# Altium PCB Beacon_Vcut.PcbDoc
Units mm, origin at the board's own origin, x right, y up, seen from the top; angles counter-clockwise.
Board outline 49.34 x 19.81 mm, 2 copper layers (Top Layer, Bottom Layer); 140 components, 0 nets, 340 pads, 85 vias.
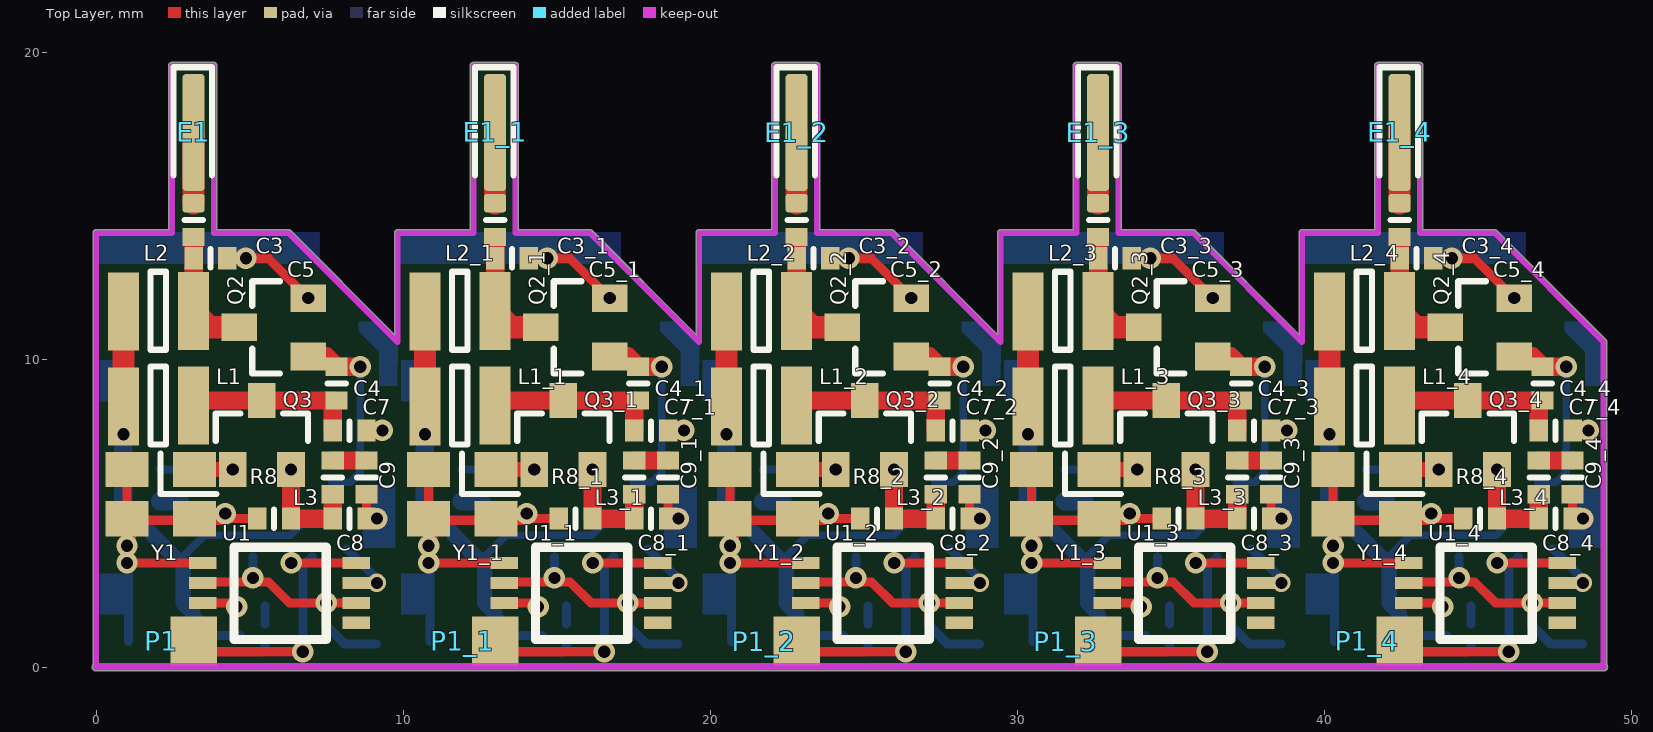
[diagram p0: Top Layer view]
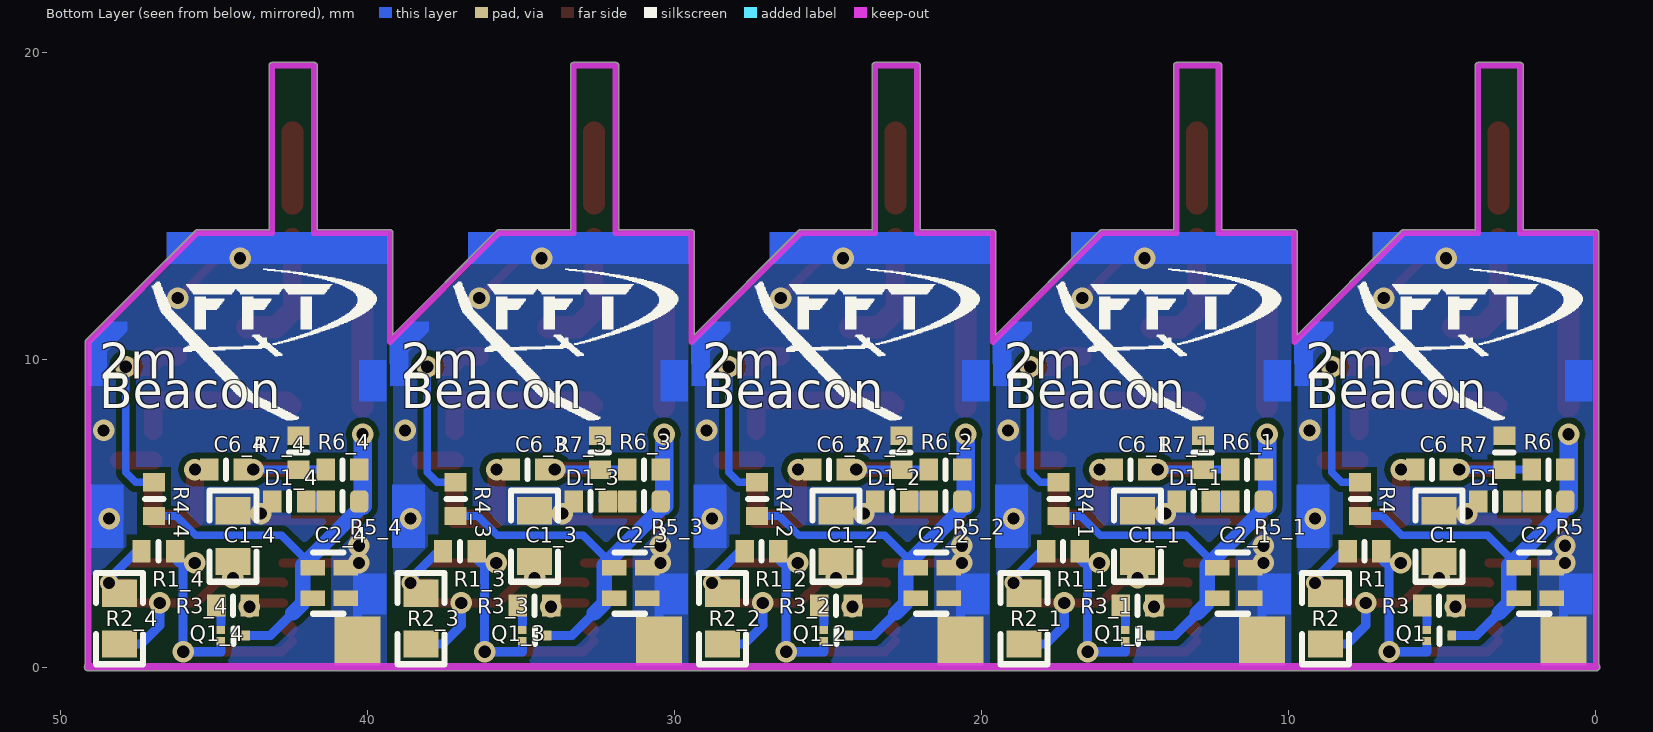
[diagram p1: Bottom Layer view, seen from below]

## Layer stack, top to bottom
Top Layer: signal copper 0.0356
Dielectric: dielectric 0.32, FR-4, Dk 4.8
Bottom Layer: signal copper 0.0356

## Board outline
0,-0.127 cw(c0,0) -0.1,0.078 -0.1,14.136 cw(c0,14.136) 0,14.237 2.364,14.237 2.364,19.586 cw(c2.464,19.586) 2.464,19.686 3.833,19.686 cw(c3.833,19.586) 3.933,19.586 3.933,14.237 6.264,14.237 cw(c6.264,14.136) 6.335,14.207 9.717,10.825 9.717,14.136 cw(c9.817,14.136) 9.817,14.237 12.181,14.237 12.181,19.586 cw(c12.282,19.586) 12.282,19.686 13.65,19.686 cw(c13.65,19.586) 13.751,19.586 13.751,14.237 16.081,14.237 cw(c16.081,14.136) 16.152,14.207 19.534,10.825 19.534,14.136 cw(c19.635,14.136) 19.635,14.237 21.998,14.237 21.998,19.586 cw(c22.099,19.586) 22.099,19.686 23.468,19.686 cw(c23.468,19.586) 23.568,19.586 23.568,14.237 25.898,14.237 cw(c25.898,14.136) 25.969,14.207 29.351,10.825 29.351,14.136 cw(c29.452,14.136) 29.452,14.237 31.816,14.237 31.816,19.586 cw(c31.916,19.586) 31.916,19.686 33.285,19.686 cw(c33.285,19.586) 33.385,19.586 33.385,14.237 35.715,14.237 cw(c35.715,14.136) 35.786,14.207 39.169,10.825 39.169,14.136 cw(c39.269,14.136) 39.269,14.237 41.633,14.237 41.633,19.586 cw(c41.733,19.586) 41.733,19.686 43.102,19.686 cw(c43.102,19.586) 43.202,19.586 43.202,14.237 45.533,14.237 cw(c45.533,14.136) 45.604,14.207 49.157,10.654 cw(c49.086,10.583) 49.187,10.583 49.187,0.078 cw(c49.086,0) 49.214,0 cw(c49.086,0) 49.086,-0.127

## Design rules (kind name [scope] priority, off if disabled: settings)
Clearance [All] p1: gap=0.254
PolygonConnect [All] p1: connectstyle=Relief reliefconductorwidth=0.254 reliefentries=4 polygonreliefangle="90 Angle" airgapwidth=0.254
RoutingVias [All] p1: holewidth=0.711 width=1.27 viastyle="Through Hole" minholewidth=0.711 minwidth=1.27 maxholewidth=0.711 maxwidth=1.27
SolderMaskExpansion [All] p1: expansion=0.102
Width [All] p1: maxlimit=0.254 minlimit=0.254 preferedwidth=0.254
28 further rules are at their usual default settings.

## Components (designator, comment, footprint, x,y, rotation, side; value= is the part's Value field where it differs from the comment)
C1 "0.1uF" 0603 5.108,4.262 r270 bottom
C1_1 "0.1uF" 0603 14.925,4.262 r270 bottom (schematic designator C1)
C1_2 "0.1uF" 0603 24.742,4.262 r270 bottom (schematic designator C1)
C1_3 "0.1uF" 0603 34.56,4.262 r270 bottom (schematic designator C1)
C1_4 "0.1uF" 0603 44.377,4.262 r270 bottom (schematic designator C1)
C2 "1000pF" CKCL22 2.507,3.235 r270 bottom
C2_1 "1000pF" CKCL22 12.324,3.235 r270 bottom (schematic designator C2)
C2_2 "1000pF" CKCL22 22.141,3.235 r270 bottom (schematic designator C2)
C2_3 "1000pF" CKCL22 31.958,3.235 r270 bottom (schematic designator C2)
C2_4 "1000pF" CKCL22 41.776,3.235 r270 bottom (schematic designator C2)
C3 "4.7pF" 0402#1 3.175,14.553 r270 top
C3_1 "4.7pF" 0402#1 12.992,14.553 r270 top (schematic designator C3)
C3_2 "4.7pF" 0402#1 22.81,14.553 r270 top (schematic designator C3)
C3_3 "4.7pF" 0402#1 32.627,14.553 r270 top (schematic designator C3)
C3_4 "4.7pF" 0402#1 42.444,14.553 r270 top (schematic designator C3)
C4 "10pF" 0402#2 7.829,9.23 r270 top
C4_1 "10pF" 0402#2 17.647,9.23 r270 top (schematic designator C4)
C4_2 "10pF" 0402#2 27.464,9.23 r270 top (schematic designator C4)
C4_3 "10pF" 0402#2 37.281,9.23 r270 top (schematic designator C4)
C4_4 "10pF" 0402#2 47.099,9.23 r270 top (schematic designator C4)
C5 "33pF" 0402#2 3.725,13.312 r180 top
C5_1 "33pF" 0402#2 13.542,13.312 r180 top (schematic designator C5)
C5_2 "33pF" 0402#2 23.36,13.312 r180 top (schematic designator C5)
C5_3 "33pF" 0402#2 33.177,13.312 r180 top (schematic designator C5)
C5_4 "33pF" 0402#2 42.994,13.312 r180 top (schematic designator C5)
C6 "22pF" 0402#2 5.334,6.43 r180 bottom
C6_1 "22pF" 0402#2 15.151,6.43 r180 bottom (schematic designator C6)
C6_2 "22pF" 0402#2 24.969,6.43 r180 bottom (schematic designator C6)
C6_3 "22pF" 0402#2 34.786,6.43 r180 bottom (schematic designator C6)
C6_4 "22pF" 0402#2 44.603,6.43 r180 bottom (schematic designator C6)
C7 "47pF" 0402#2 8.255,7.7 r180 top
C7_1 "47pF" 0402#2 18.072,7.7 r180 top (schematic designator C7)
C7_2 "47pF" 0402#2 27.89,7.7 r180 top (schematic designator C7)
C7_3 "47pF" 0402#2 37.707,7.7 r180 top (schematic designator C7)
C7_4 "47pF" 0402#2 47.524,7.7 r180 top (schematic designator C7)
C8 "100pF" 0402#2 8.255,4.834 r180 top
C8_1 "100pF" 0402#2 18.072,4.834 r180 top (schematic designator C8)
C8_2 "100pF" 0402#2 27.89,4.834 r180 top (schematic designator C8)
C8_3 "100pF" 0402#2 37.707,4.834 r180 top (schematic designator C8)
C8_4 "100pF" 0402#2 47.524,4.834 r180 top (schematic designator C8)
C9 "1000pF" 0402#2 8.805,6.175 r270 top
C9_1 "1000pF" 0402#2 18.622,6.175 r270 top (schematic designator C9)
C9_2 "1000pF" 0402#2 28.44,6.175 r270 top (schematic designator C9)
C9_3 "1000pF" 0402#2 38.257,6.175 r270 top (schematic designator C9)
C9_4 "1000pF" 0402#2 48.074,6.175 r270 top (schematic designator C9)
D1 "LED0" 0402#2 3.279,5.392 r0 bottom
D1_1 "LED0" 0402#2 13.096,5.392 r0 bottom (schematic designator D1)
D1_2 "LED0" 0402#2 22.913,5.392 r0 bottom (schematic designator D1)
D1_3 "LED0" 0402#2 32.73,5.392 r0 bottom (schematic designator D1)
D1_4 "LED0" 0402#2 42.548,5.392 r0 bottom (schematic designator D1)
E1 "Antenna" PIN1 3.175,17.406 r0 top
E1_1 "Antenna" PIN1 12.992,17.406 r0 top (schematic designator E1)
E1_2 "Antenna" PIN1 22.81,17.406 r0 top (schematic designator E1)
E1_3 "Antenna" PIN1 32.627,17.406 r0 top (schematic designator E1)
E1_4 "Antenna" PIN1 42.444,17.406 r0 top (schematic designator E1)
L1 "1uH" 1008 3.175,8.52 r180 top
L1_1 "1uH" 1008 12.992,8.52 r180 top (schematic designator L1)
L1_2 "1uH" 1008 22.81,8.52 r180 top (schematic designator L1)
L1_3 "1uH" 1008 32.627,8.52 r180 top (schematic designator L1)
L1_4 "1uH" 1008 42.444,8.52 r180 top (schematic designator L1)
L2 "1.2uH" 1008 3.175,11.6 r180 top
L2_1 "1.2uH" 1008 12.992,11.6 r180 top (schematic designator L2)
L2_2 "1.2uH" 1008 22.81,11.6 r180 top (schematic designator L2)
L2_3 "1.2uH" 1008 32.627,11.6 r180 top (schematic designator L2)
L2_4 "1.2uH" 1008 42.444,11.6 r180 top (schematic designator L2)
L3 "0.27uH" 0402#2 7.705,6.175 r90 top
L3_1 "0.27uH" 0402#2 17.522,6.175 r90 top (schematic designator L3)
L3_2 "0.27uH" 0402#2 27.34,6.175 r90 top (schematic designator L3)
L3_3 "0.27uH" 0402#2 37.157,6.175 r90 top (schematic designator L3)
L3_4 "0.27uH" 0402#2 46.974,6.175 r90 top (schematic designator L3)
P1 "Header 2" HDR1X2 1.052,0.843 r0 top
P1_1 "Header 2" HDR1X2 10.869,0.843 r0 top (schematic designator P1)
P1_2 "Header 2" HDR1X2 20.687,0.843 r0 top (schematic designator P1)
P1_3 "Header 2" HDR1X2 30.504,0.843 r0 top (schematic designator P1)
P1_4 "Header 2" HDR1X2 40.321,0.843 r0 top (schematic designator P1)
Q1 "MMBT3906" sot-923f 5.503,1.21 r270 bottom
Q1_1 "MMBT3906" sot-923f 15.32,1.21 r270 bottom (schematic designator Q1)
Q1_2 "MMBT3906" sot-923f 25.138,1.21 r270 bottom (schematic designator Q1)
Q1_3 "MMBT3906" sot-923f 34.955,1.21 r270 bottom (schematic designator Q1)
Q1_4 "MMBT3906" sot-923f 44.772,1.21 r270 bottom (schematic designator Q1)
Q2 "MMBR951L" sot-23 6.907,10.113 r90 top
Q2_1 "MMBR951L" sot-23 16.724,10.113 r90 top (schematic designator Q2)
Q2_2 "MMBR951L" sot-23 26.542,10.113 r90 top (schematic designator Q2)
Q2_3 "MMBR951L" sot-23 36.359,10.113 r90 top (schematic designator Q2)
Q2_4 "MMBR951L" sot-23 46.176,10.113 r90 top (schematic designator Q2)
Q3 "MMBR951L" sot-23 4.445,6.43 r0 top
Q3_1 "MMBR951L" sot-23 14.262,6.43 r0 top (schematic designator Q3)
Q3_2 "MMBR951L" sot-23 24.08,6.43 r0 top (schematic designator Q3)
Q3_3 "MMBR951L" sot-23 33.897,6.43 r0 top (schematic designator Q3)
Q3_4 "MMBR951L" sot-23 43.714,6.43 r0 top (schematic designator Q3)
R1 "10M" 0402#2 7.536,3.769 r180 bottom
R1_1 "10M" 0402#2 17.353,3.769 r180 bottom (schematic designator R1)
R1_2 "10M" 0402#2 27.171,3.769 r180 bottom (schematic designator R1)
R1_3 "10M" 0402#2 36.988,3.769 r180 bottom (schematic designator R1)
R1_4 "10M" 0402#2 46.805,3.769 r180 bottom (schematic designator R1)
R2 "1M" 0603 8.805,1.577 r90 bottom
R2_1 "1M" 0603 18.622,1.577 r90 bottom (schematic designator R2)
R2_2 "1M" 0603 28.44,1.577 r90 bottom (schematic designator R2)
R2_3 "1M" 0603 38.257,1.577 r90 bottom (schematic designator R2)
R2_4 "1M" 0603 48.074,1.577 r90 bottom (schematic designator R2)
R3 "5.1K" 0402#2 5.108,2 r0 bottom
R3_1 "5.1K" 0402#2 14.925,2 r0 bottom (schematic designator R3)
R3_2 "5.1K" 0402#2 24.742,2 r0 bottom (schematic designator R3)
R3_3 "5.1K" 0402#2 34.56,2 r0 bottom (schematic designator R3)
R3_4 "5.1K" 0402#2 44.377,2 r0 bottom (schematic designator R3)
R4 "39K" 0402#2 7.675,5.469 r270 bottom
R4_1 "39K" 0402#2 17.492,5.469 r270 bottom (schematic designator R4)
R4_2 "39K" 0402#2 27.309,5.469 r270 bottom (schematic designator R4)
R4_3 "39K" 0402#2 37.127,5.469 r270 bottom (schematic designator R4)
R4_4 "39K" 0402#2 46.944,5.469 r270 bottom (schematic designator R4)
R5 "3K3" 0402#3 1.544,5.392 r180 bottom
R5_1 "3K3" 0402#3 11.361,5.392 r180 bottom (schematic designator R5)
R5_2 "3K3" 0402#3 21.179,5.392 r180 bottom (schematic designator R5)
R5_3 "3K3" 0402#3 30.996,5.392 r180 bottom (schematic designator R5)
R5_4 "3K3" 0402#3 40.813,5.392 r180 bottom (schematic designator R5)
R6 "5.1K" 0402#2 1.544,6.43 r180 bottom
R6_1 "5.1K" 0402#2 11.361,6.43 r180 bottom (schematic designator R6)
R6_2 "5.1K" 0402#2 21.179,6.43 r180 bottom (schematic designator R6)
R6_3 "5.1K" 0402#2 30.996,6.43 r180 bottom (schematic designator R6)
R6_4 "5.1K" 0402#2 40.813,6.43 r180 bottom (schematic designator R6)
R7 "10K" 0402#2 2.977,6.98 r270 bottom
R7_1 "10K" 0402#2 12.794,6.98 r270 bottom (schematic designator R7)
R7_2 "10K" 0402#2 22.612,6.98 r270 bottom (schematic designator R7)
R7_3 "10K" 0402#2 32.429,6.98 r270 bottom (schematic designator R7)
R7_4 "10K" 0402#2 42.246,6.98 r270 bottom (schematic designator R7)
R8 "330" 0402#2 5.795,4.834 r0 top
R8_1 "330" 0402#2 15.612,4.834 r0 top (schematic designator R8)
R8_2 "330" 0402#2 25.43,4.834 r0 top (schematic designator R8)
R8_3 "330" 0402#2 35.247,4.834 r0 top (schematic designator R8)
R8_4 "330" 0402#2 45.064,4.834 r0 top (schematic designator R8)
U1 "LMC555CM" VSSOP8 5.969,2.413 r270 top
U1_1 "LMC555CM" VSSOP8 15.786,2.413 r270 top (schematic designator U1)
U1_2 "LMC555CM" VSSOP8 25.604,2.413 r270 top (schematic designator U1)
U1_3 "LMC555CM" VSSOP8 35.421,2.413 r270 top (schematic designator U1)
U1_4 "LMC555CM" VSSOP8 45.238,2.413 r270 top (schematic designator U1)
Y1 "48Mhz" "XTAL 3.2X2.5" 2.106,5.63 r180 top
Y1_1 "48Mhz" "XTAL 3.2X2.5" 11.923,5.63 r180 top (schematic designator Y1)
Y1_2 "48Mhz" "XTAL 3.2X2.5" 21.74,5.63 r180 top (schematic designator Y1)
Y1_3 "48Mhz" "XTAL 3.2X2.5" 31.557,5.63 r180 top (schematic designator Y1)
Y1_4 "48Mhz" "XTAL 3.2X2.5" 41.375,5.63 r180 top (schematic designator Y1)

## Footprints (in the part's own frame and the unit in brackets; to place one, negate y for a bottom-side part, rotate by r counter-clockwise, add the part's x,y. Pads: shape width x height; smd on the part's side, far side on the other; paste and mask are expansions set on the pad)
0402#1 [mm] "Chip Resistor, 2-Leads, Body 1,0x0,5mm, IPC Medium Density"
  rrect30% 0.6x0.72 smd: 1(-0.55,0)
  rect 0.6x0.72 smd: 2(0.55,0)
  Top Layer pour cut-out: -0.253,0.36 -0.253,-0.359 0.253,-0.359 0.253,0.36
  silkscreen extent 0,-0.3 0,0.3, body extent -0.55,-0.3 0.55,0.3, height 0.6
0402#2 [mm] "Chip Resistor, 2-Leads, Body 1,0x0,5mm, IPC Medium Density"
  rect 0.6x0.72 smd: 1(-0.55,0) 2(0.55,0)
  Top Layer pour cut-out: -0.253,0.36 -0.253,-0.359 0.253,-0.359 0.253,0.36
  silkscreen extent 0,-0.3 0,0.3, body extent -0.55,-0.3 0.55,0.3, height 0.6
0402#3 [mm] "Chip Resistor, 2-Leads, Body 1,0x0,5mm, IPC Medium Density"
  rect 0.6x0.72 smd: 1(-0.55,0)
  rrect50% 0.6x0.72 smd: 2(0.55,0)
  Top Layer pour cut-out: -0.253,0.36 -0.253,-0.359 0.253,-0.359 0.253,0.36
  silkscreen extent 0,-0.3 0,0.3, body extent -0.55,-0.3 0.55,0.3, height 0.6
0603 [mil]
  rect 35x45 smd: 1(-32.5,0) 2(32.5,0)
  silkscreen extent -58,-30 59,30
1008 [mm]
  rect 1.015x2.54 smd: 1(0,0) 2(2.285,0.03)
  silkscreen extent 0.9,-1.27 1.4,1.27, body extent -0.32,-1.39 2.6,1.4, height 2.48
CKCL22 [mm]
  rect 0.5x0.8 smd mask+0.02: 1(0,0) 2(1,0) 3(1,1.071) 4(0,1.071)
  silkscreen extent -0.5,0 1.5,1
HDR1X2 [mm] "Connector; Header; 2 Position"
  rect 1.5x1.6 smd far side: 1(0,0)
  rect 1.5x1.6 smd: 2(2.126,0)
PIN1 [mm] "Generic Antenna; 1 Lead"
  rrect30% 0.72x3.8 smd: 1(0,0)
  silkscreen extent -0.65,-1.4 0.6,2.13
sot-23 [mm]
  rect 0.9x1.15 smd: 1(0.95,2.25) 2(0,0) 3(1.9,0)
  silkscreen extent -0.55,0.93 2.45,1.83, body extent -0.49,-0.32 2.41,2.48, height 0.94
sot-923f [mm]
  rect 0.26x0.28 smd: 1(0,0) 2(0.36,0)
  rect 0.32x0.28 smd: 3(0.18,0.81)
  silkscreen extent -0.05,0.41 0.45,0.41
VSSOP8 [mm]
  rect 0.4x0.9 smd paste+0: 1(-0.975,-2.5) 2(-0.325,-2.5) 3(0.325,-2.5) 4(0.975,-2.5) 5(0.975,2.5) 6(0.325,2.5) 7(-0.325,2.5) 8(-0.975,2.5)
  silkscreen extent -1.48,-1.48 1.52,1.52
"XTAL 3.2X2.5" [mm]
  rect 1.4x1.15 smd paste+0 mask+0.05: 1(-1.1,-0.8) 2(1.1,-0.8) 3(1.1,0.8) 4(-1.1,0.8)
  silkscreen extent -1.81,-1.33 0.01,0, body extent -1.59,-1.25 1.61,1.25, height 0.91

## Part data
C1 C1_1 C1_2 C1_3 C1_4 C3 C3_1 C3_2 C3_3 C3_4 C4 C4_1 C4_2 C4_3 C4_4 C5 C5_1 C5_2 C5_3 C5_4 C6 C6_1 C6_2 C6_3 C6_4 C7 C7_1 C7_2 C7_3 C7_4 C8 C8_1 C8_2 C8_3 C8_4 C9 C9_1 C9_2 C9_3 C9_4: library part Cap, "Capacitor"
C2 C2_1 C2_2 C2_3 C2_4: library part "CAP ARRAY 2"
D1 D1_1 D1_2 D1_3 D1_4: "Typical INFRARED GaAs LED"
E1 E1_1 E1_2 E1_3 E1_4: "Generic Antenna"
L1 L1_1 L1_2 L1_3 L1_4 L2 L2_1 L2_2 L2_3 L2_4 L3 L3_1 L3_2 L3_3 L3_4: library part Inductor, "Inductor"
P1 P1_1 P1_2 P1_3 P1_4: "Header, 2-Pin"
Q1 Q1_1 Q1_2 Q1_3 Q1_4: "PNP Switching Transistor"
Q2 Q2_1 Q2_2 Q2_3 Q2_4 Q3 Q3_1 Q3_2 Q3_3 Q3_4: library part NPN, "NPN Bipolar Transistor"
R1 R1_1 R1_2 R1_3 R1_4 R2 R2_1 R2_2 R2_3 R2_4 R3 R3_1 R3_2 R3_3 R3_4 R4 R4_1 R4_2 R4_3 R4_4 R5 R5_1 R5_2 R5_3 R5_4 R6 R6_1 R6_2 R6_3 R6_4 R7 R7_1 R7_2 R7_3 R7_4 R8 R8_1 R8_2 R8_3 R8_4: library part Res1, "Resistor"
Y1 Y1_1 Y1_2 Y1_3 Y1_4: library part "Xtal 4pin"

## Via types
v1: diameter 0.7/0.7 (per signal layer), hole 0.4, Top Layer to Bottom Layer, 65 vias
v2: diameter 0.7/0.7 (per signal layer), hole 0.4, Top Layer to Bottom Layer, tented bottom, 15 vias
v3: diameter 0.6/0.6 (per signal layer), hole 0.4, Top Layer to Bottom Layer, 5 vias

## Nets (pads, with @x,y where several pads share a name; then routed paths per layer and width w, separated by ;. In a path a pad name is that pad's centre, name@x,y a point inside that pad or via, vN(x,y) a via of type N, cw(c..) or ccw(c..) an arc to the next point about the centre after c; other vN are vias at no path point)
pads on no net: C1.1 C1.2 C1_1.1 C1_1.2 C1_2.1 C1_2.2 C1_3.1 C1_3.2 C1_4.1 C1_4.2 C2.1 C2.2 C2.3 C2.4 C2_1.1 C2_1.2 C2_1.3 C2_1.4 C2_2.1 C2_2.2 C2_2.3 C2_2.4 C2_3.1 C2_3.2 C2_3.3 C2_3.4 C2_4.1 C2_4.2 C2_4.3 C2_4.4 C3.1 C3.2 C3_1.1 C3_1.2 C3_2.1 C3_2.2 C3_3.1 C3_3.2 C3_4.1 C3_4.2 C4.1 C4.2 C4_1.1 C4_1.2 C4_2.1 C4_2.2 C4_3.1 C4_3.2 C4_4.1 C4_4.2 C5.1 C5.2 C5_1.1 C5_1.2 C5_2.1 C5_2.2 C5_3.1 C5_3.2 C5_4.1 C5_4.2 C6.1 C6.2 C6_1.1 C6_1.2 C6_2.1 C6_2.2 C6_3.1 C6_3.2 C6_4.1 C6_4.2 C7.1 C7.2 C7_1.1 C7_1.2 C7_2.1 C7_2.2 C7_3.1 C7_3.2 C7_4.1 C7_4.2 C8.1 C8.2 C8_1.1 C8_1.2 C8_2.1 C8_2.2 C8_3.1 C8_3.2 C8_4.1 C8_4.2 C9.1 C9.2 C9_1.1 C9_1.2 C9_2.1 C9_2.2 C9_3.1 C9_3.2 C9_4.1 C9_4.2 D1.1 D1.2 D1_1.1 D1_1.2 D1_2.1 D1_2.2 D1_3.1 D1_3.2 D1_4.1 D1_4.2 E1.1 E1_1.1 E1_2.1 E1_3.1 E1_4.1 L1.1 L1.2 L1_1.1 L1_1.2 L1_2.1 L1_2.2 L1_3.1 L1_3.2 L1_4.1 L1_4.2 L2.1 L2.2 L2_1.1 L2_1.2 L2_2.1 L2_2.2 L2_3.1 L2_3.2 L2_4.1 L2_4.2 L3.1 L3.2 L3_1.1 L3_1.2 L3_2.1 L3_2.2 L3_3.1 L3_3.2 L3_4.1 L3_4.2 P1.1 P1.2 P1_1.1 P1_1.2 P1_2.1 P1_2.2 P1_3.1 P1_3.2 P1_4.1 P1_4.2 Q1.1 Q1.2 Q1.3 Q1_1.1 Q1_1.2 Q1_1.3 Q1_2.1 Q1_2.2 Q1_2.3 Q1_3.1 Q1_3.2 Q1_3.3 Q1_4.1 Q1_4.2 Q1_4.3 Q2.1 Q2.2 Q2.3 Q2_1.1 Q2_1.2 Q2_1.3 Q2_2.1 Q2_2.2 Q2_2.3 Q2_3.1 Q2_3.2 Q2_3.3 Q2_4.1 Q2_4.2 Q2_4.3 Q3.1 Q3.2 Q3.3 Q3_1.1 Q3_1.2 Q3_1.3 Q3_2.1 Q3_2.2 Q3_2.3 Q3_3.1 Q3_3.2 Q3_3.3 Q3_4.1 Q3_4.2 Q3_4.3 R1.1 R1.2 R1_1.1 R1_1.2 R1_2.1 R1_2.2 R1_3.1 R1_3.2 R1_4.1 R1_4.2 R2.1 R2.2 R2_1.1 R2_1.2 R2_2.1 R2_2.2 R2_3.1 R2_3.2 R2_4.1 R2_4.2 R3.1 R3.2 R3_1.1 R3_1.2 R3_2.1 R3_2.2 R3_3.1 R3_3.2 R3_4.1 R3_4.2 R4.1 R4.2 R4_1.1 R4_1.2 R4_2.1 R4_2.2 R4_3.1 R4_3.2 R4_4.1 R4_4.2 R5.1 R5.2 R5_1.1 R5_1.2 R5_2.1 R5_2.2 R5_3.1 R5_3.2 R5_4.1 R5_4.2 R6.1 R6.2 R6_1.1 R6_1.2 R6_2.1 R6_2.2 R6_3.1 R6_3.2 R6_4.1 R6_4.2 R7.1 R7.2 R7_1.1 R7_1.2 R7_2.1 R7_2.2 R7_3.1 R7_3.2 R7_4.1 R7_4.2 R8.1 R8.2 R8_1.1 R8_1.2 R8_2.1 R8_2.2 R8_3.1 R8_3.2 R8_4.1 R8_4.2 U1.1 U1.2 U1.3 U1.4 U1.5 U1.6 U1.7 U1.8 U1_1.1 U1_1.2 U1_1.3 U1_1.4 U1_1.5 U1_1.6 U1_1.7 U1_1.8 U1_2.1 U1_2.2 U1_2.3 U1_2.4 U1_2.5 U1_2.6 U1_2.7 U1_2.8 U1_3.1 U1_3.2 U1_3.3 U1_3.4 U1_3.5 U1_3.6 U1_3.7 U1_3.8 U1_4.1 U1_4.2 U1_4.3 U1_4.4 U1_4.5 U1_4.6 U1_4.7 U1_4.8 Y1.1 Y1.2 Y1.3 Y1.4 Y1_1.1 Y1_1.2 Y1_1.3 Y1_1.4 Y1_2.1 Y1_2.2 Y1_2.3 Y1_2.4 Y1_3.1 Y1_3.2 Y1_3.3 Y1_3.4 Y1_4.1 Y1_4.2 Y1_4.3 Y1_4.4
copper on no net: | length 416.3
  Top Layer w0.3: 1.006,6.43 1.006,4.83 1.058,4.777 ; v1@1.143,3.388 3.469,3.388 ; v1@1.148,3.947 1.148,4.688 1.058,4.777 ; 3.178,0.843 3.525,0.496 v1(6.732,0.496) ; 3.469,2.088 v1@4.572,2.088 ; 3.469,2.738 3.496,2.765 5.617,2.765 6.294,2.088 v1(7.493,2.088) 8.469,2.088 ; v1@4.164,4.777 1.058,4.777 ; v1@4.164,4.834 5.245,4.834 ; v1(4.877,13.312) 5.608,13.312 v2(6.907,12.013) ; v1(6.35,3.388) 8.469,3.388 ; 8.469,2.738 v3@9.271,2.738 ; v1@8.805,4.834 8.805,5.625 ; 10.823,6.43 10.823,4.83 10.875,4.777 ; v1@10.96,3.388 13.286,3.388 ; v1@10.965,3.947 10.965,4.688 10.875,4.777 ; 12.996,0.843 13.342,0.496 v1(16.549,0.496) ; 13.286,2.088 v1@14.389,2.088 ; 13.286,2.738 13.313,2.765 15.434,2.765 16.111,2.088 v1(17.31,2.088) 18.286,2.088 ; v1@13.982,4.777 10.875,4.777 ; v1@13.982,4.834 15.062,4.834 ; v1(14.695,13.312) 15.426,13.312 v2(16.724,12.013) ; v1(16.167,3.388) 18.286,3.388 ; 18.286,2.738 v3@19.088,2.738 ; v1@18.622,4.834 18.622,5.625 ; 20.64,6.43 20.64,4.83 20.693,4.777 ; v1@20.778,3.388 23.104,3.388 ; v1@20.782,3.947 20.782,4.688 20.693,4.777 ; 22.813,0.843 23.159,0.496 v1(26.367,0.496) ; 23.104,2.088 v1@24.207,2.088 ; 23.104,2.738 23.131,2.765 25.252,2.765 25.929,2.088 v1(27.128,2.088) 28.104,2.088 ; v1@23.799,4.777 20.693,4.777 ; v1@23.799,4.834 24.88,4.834 ; v1(24.512,13.312) 25.243,13.312 v2(26.542,12.013) ; v1(25.985,3.388) 28.104,3.388 ; 28.104,2.738 v3@28.906,2.738 ; v1@28.44,4.834 28.44,5.625 ; 30.457,6.43 30.457,4.83 30.51,4.777 ; v1@30.595,3.388 32.921,3.388 ; v1@30.599,3.947 30.599,4.688 30.51,4.777 ; 32.63,0.843 32.977,0.496 v1(36.184,0.496) ; 32.921,2.088 v1@34.024,2.088 ; 32.921,2.738 32.948,2.765 35.069,2.765 35.746,2.088 v1(36.945,2.088) 37.921,2.088 ; v1@33.616,4.777 30.51,4.777 ; v1@33.616,4.834 34.697,4.834 ; v1(34.329,13.312) 35.06,13.312 v2(36.359,12.013) ; v1(35.802,3.388) 37.921,3.388 ; 37.921,2.738 v3@38.723,2.738 ; v1@38.257,4.834 38.257,5.625 ; 40.275,6.43 40.275,4.83 40.327,4.777 ; v1@40.412,3.388 42.738,3.388 ; v1@40.417,3.947 40.417,4.688 40.327,4.777 ; 42.447,0.843 42.794,0.496 v1(46.001,0.496) ; 42.738,2.088 v1@43.841,2.088 ; 42.738,2.738 42.765,2.765 44.886,2.765 45.563,2.088 v1(46.762,2.088) 47.738,2.088 ; v1@43.433,4.777 40.327,4.777 ; v1@43.433,4.834 44.514,4.834 ; v1(44.146,13.312) 44.877,13.312 v2(46.176,12.013) ; v1(45.619,3.388) 47.738,3.388 ; 47.738,2.738 v3@48.54,2.738 ; v1@48.074,4.834 48.074,5.625
  Top Layer w0.5: 3.206,6.43 v1(4.445,6.43) ; 3.254,1.223 3.411,1.38 ; 13.023,6.43 v1(14.262,6.43) ; 13.071,1.223 13.228,1.38 ; 22.84,6.43 v1(24.08,6.43) ; 22.889,1.223 23.045,1.38 ; 32.657,6.43 v1(33.897,6.43) ; 32.706,1.223 32.862,1.38 ; 42.475,6.43 v1(43.714,6.43) ; 42.523,1.223 42.68,1.38
  Top Layer w0.6: 3.175,8.52 3.335,8.68 5.395,8.68 7.705,8.68 7.705,7.7 ; 3.175,11.6 3.175,13.312 3.175,14.003 ; v1(6.345,6.43) 6.345,4.834 7.705,4.834 7.705,5.625 ; 6.907,10.113 7.496,10.113 7.829,9.78 v2(8.598,9.78) ; 7.705,6.725 8.805,6.725 ; 12.992,8.52 13.152,8.68 15.212,8.68 17.522,8.68 17.522,7.7 ; 12.992,11.6 12.992,13.312 12.992,14.003 ; v1(16.162,6.43) 16.162,4.834 17.522,4.834 17.522,5.625 ; 16.724,10.113 17.314,10.113 17.647,9.78 v2(18.415,9.78) ; 17.522,6.725 18.622,6.725 ; 22.81,8.52 22.97,8.68 25.03,8.68 27.34,8.68 27.34,7.7 ; 22.81,11.6 22.81,13.312 22.81,14.003 ; v1(25.98,6.43) 25.98,4.834 27.34,4.834 27.34,5.625 ; 26.542,10.113 27.131,10.113 27.464,9.78 v2(28.232,9.78) ; 27.34,6.725 28.44,6.725 ; 32.627,8.52 32.787,8.68 34.847,8.68 37.157,8.68 37.157,7.7 ; 32.627,11.6 32.627,13.312 32.627,14.003 ; v1(35.797,6.43) 35.797,4.834 37.157,4.834 37.157,5.625 ; 36.359,10.113 36.948,10.113 37.281,9.78 v2(38.05,9.78) ; 37.157,6.725 38.257,6.725 ; 42.444,8.52 42.604,8.68 44.664,8.68 46.974,8.68 46.974,7.7 ; 42.444,11.6 42.444,13.312 42.444,14.003 ; v1(45.614,6.43) 45.614,4.834 46.974,4.834 46.974,5.625 ; 46.176,10.113 46.766,10.113 47.099,9.78 v2(47.867,9.78) ; 46.974,6.725 48.074,6.725
  Top Layer w0.72: 0.89,8.49 0.89,11.57 ; 3.175,11.6 3.712,11.063 4.657,11.063 ; 3.175,15.103 3.175,17.406 ; 10.707,8.49 10.707,11.57 ; 12.992,11.6 13.529,11.063 14.474,11.063 ; 12.992,15.103 12.992,17.406 ; 20.525,8.49 20.525,11.57 ; 22.81,11.6 23.347,11.063 24.292,11.063 ; 22.81,15.103 22.81,17.406 ; 30.342,8.49 30.342,11.57 ; 32.627,11.6 33.164,11.063 34.109,11.063 ; 32.627,15.103 32.627,17.406 ; 40.159,8.49 40.159,11.57 ; 42.444,11.6 42.981,11.063 43.926,11.063 ; 42.444,15.103 42.444,17.406
  Bottom Layer w0.254: 2.078,6.43 2.919,6.43 v1(4.445,6.43) ; 2.69,3.455 3.527,4.292 6.323,4.292 6.95,4.919 7.675,4.919 ; 7.675,6.019 8.276,6.019 8.598,6.34 v2@8.598,9.757 ; 11.895,6.43 12.736,6.43 v1(14.262,6.43) ; 12.508,3.455 13.344,4.292 16.14,4.292 16.768,4.919 17.492,4.919 ; 17.492,6.019 18.093,6.019 18.415,6.34 v2@18.415,9.757 ; 21.713,6.43 22.553,6.43 v1(24.08,6.43) ; 22.325,3.455 23.161,4.292 25.958,4.292 26.585,4.919 27.309,4.919 ; 27.309,6.019 27.911,6.019 28.232,6.34 v2@28.232,9.757 ; 31.53,6.43 32.37,6.43 v1(33.897,6.43) ; 32.142,3.455 32.979,4.292 35.775,4.292 36.402,4.919 37.127,4.919 ; 37.127,6.019 37.728,6.019 38.05,6.34 v2@38.05,9.757 ; 41.347,6.43 42.188,6.43 v1(43.714,6.43) ; 41.959,3.455 42.796,4.292 45.592,4.292 46.22,4.919 46.944,4.919 ; 46.944,6.019 47.545,6.019 47.867,6.34 v2@47.867,9.757
  Bottom Layer w0.3: 1.052,0.843 1.052,3.297 v1@1.143,3.388 ; 3.157,1.76 3.887,1.03 4.693,1.03 ; v1(5.108,2.9) 5.108,3.585 ; 5.503,0.742 5.503,0.496 v1(6.732,0.496) 6.732,3.381 ; 5.503,1.4 5.503,1.985 ; v1(6.35,3.388) 6.849,3.388 7.04,3.578 ; v1(7.493,2.088) 7.493,1.354 8.095,0.751 9.126,0.751 ; 8.164,3.847 v3@9.27,2.74 ; 10.869,0.843 10.869,3.297 v1@10.96,3.388 ; 12.974,1.76 13.704,1.03 14.51,1.03 ; v1(14.925,2.9) 14.925,3.585 ; 15.32,0.742 15.32,0.496 v1(16.549,0.496) 16.549,3.381 ; 15.32,1.4 15.32,1.985 ; v1(16.167,3.388) 16.666,3.388 16.857,3.578 ; v1(17.31,2.088) 17.31,1.354 17.913,0.751 18.943,0.751 ; 17.981,3.847 v3@19.087,2.74 ; 20.687,0.843 20.687,3.297 v1@20.778,3.388 ; 22.791,1.76 23.522,1.03 24.328,1.03 ; v1(24.742,2.9) 24.742,3.585 ; 25.138,0.742 25.138,0.496 v1(26.367,0.496) 26.367,3.381 ; 25.138,1.4 25.138,1.985 ; v1(25.985,3.388) 26.484,3.388 26.674,3.578 ; v1(27.128,2.088) 27.128,1.354 27.73,0.751 28.76,0.751 ; 27.798,3.847 v3@28.905,2.74 ; 30.504,0.843 30.504,3.297 v1@30.595,3.388 ; 32.609,1.76 33.339,1.03 34.145,1.03 ; v1(34.56,2.9) 34.56,3.585 ; 34.955,0.742 34.955,0.496 v1(36.184,0.496) 36.184,3.381 ; 34.955,1.4 34.955,1.985 ; v1(35.802,3.388) 36.301,3.388 36.491,3.578 ; v1(36.945,2.088) 36.945,1.354 37.547,0.751 38.578,0.751 ; 37.616,3.847 v3@38.722,2.74 ; 40.321,0.843 40.321,3.297 v1@40.412,3.388 ; 42.426,1.76 43.156,1.03 43.962,1.03 ; v1(44.377,2.9) 44.377,3.585 ; 44.772,0.742 44.772,0.496 v1(46.001,0.496) 46.001,3.381 ; 44.772,1.4 44.772,1.985 ; v1(45.619,3.388) 46.118,3.388 46.309,3.578 ; v1(46.762,2.088) 46.762,1.354 47.365,0.751 48.395,0.751 ; 47.433,3.847 v3@48.539,2.74
  Bottom Layer w0.5: 0.889,5.256 2.69,3.455 ; 2.833,3.313 2.833,2.084 3.157,1.76 ; 10.706,5.256 12.508,3.455 ; 12.65,3.313 12.65,2.084 12.974,1.76 ; 20.524,5.256 22.325,3.455 ; 22.467,3.313 22.467,2.084 22.791,1.76 ; 30.341,5.256 32.142,3.455 ; 32.284,3.313 32.284,2.084 32.609,1.76 ; 40.158,5.256 41.959,3.455 ; 42.102,3.313 42.102,2.084 42.426,1.76
  Bottom Layer w0.6: 0.889,5.256 v1(0.889,7.58) ; 2.094,5.392 2.729,5.392 ; 10.706,5.256 v1(10.706,7.58) ; 11.911,5.392 12.546,5.392 ; 20.524,5.256 v1(20.524,7.58) ; 21.729,5.392 22.363,5.392 ; 30.341,5.256 v1(30.341,7.58) ; 31.546,5.392 32.18,5.392 ; 40.158,5.256 v1(40.158,7.58) ; 41.363,5.392 41.998,5.392
  other v1: 4.572,1.961 14.389,1.961 24.207,1.961 34.024,1.961 43.841,1.961 1.006,3.388 10.823,3.388 20.64,3.388 30.457,3.388 40.275,3.388 1.006,3.947 10.823,3.947 20.64,3.947 30.457,3.947 40.275,3.947 9.144,4.834 18.961,4.834 28.779,4.834 38.596,4.834 48.413,4.834 4.202,4.997 14.02,4.997 23.837,4.997 33.654,4.997 43.471,4.997
  other v2: 9.323,7.703 19.141,7.703 28.958,7.703 38.775,7.703 48.592,7.703
  other v3: 9.144,2.738 18.961,2.738 28.779,2.738 38.596,2.738 48.413,2.738

## Polygon pours and split planes (outlines as drawn)
no net on Bottom Layer "Top Layer-No Net" (solid, remove dead copper, pour order 5): 49.086,-0.1 39.269,-0.1 39.169,0 39.169,14.136 45.633,14.136 49.187,10.583
no net on Bottom Layer "Top Layer-No Net" (solid, remove dead copper, pour order 5): 39.269,-0.1 29.452,-0.1 29.351,0 29.351,14.136 35.816,14.136 39.369,10.583
no net on Bottom Layer "Top Layer-No Net" (solid, remove dead copper, pour order 5): 29.452,-0.1 19.635,-0.1 19.534,0 19.534,14.136 25.999,14.136 29.552,10.583
no net on Bottom Layer "Top Layer-No Net" (solid, remove dead copper, pour order 5): 19.635,-0.1 9.817,-0.1 9.717,0 9.717,14.136 16.181,14.136 19.735,10.583
no net on Bottom Layer "Top Layer-No Net" (solid, remove dead copper, pour order 5): 9.817,-0.1 0,-0.1 -0.1,0 -0.1,14.136 6.364,14.136 9.918,10.583

## Keep-outs
Keep-Out Layer:
  lines w0.2: 0,0.765 0,0 0,14.136 2.464,14.136 2.464,19.586 3.833,19.586 3.833,14.136 6.264,14.136 9.817,10.583 9.817,14.136 12.282,14.136 12.282,19.586 13.65,19.586 13.65,14.136 16.081,14.136 19.635,10.583 19.635,14.136 22.099,14.136 22.099,19.586 23.468,19.586 23.468,14.136 25.898,14.136 29.452,10.583 29.452,14.136 31.916,14.136 31.916,19.586 33.285,19.586 33.285,14.136 35.715,14.136 39.269,10.583 39.269,14.136 41.733,14.136 41.733,19.586 43.102,19.586 43.102,14.136 45.533,14.136 49.086,10.583 49.086,0 49.086,0.765 ; 29.452,0 39.269,0
  lines w0.254: 0,0 49.086,0

## Other copper
Bottom Layer:
  region: 47.944,5.944 47.944,3.877 49.02,3.877 49.02,5.944
  region: 46.535,14.162 39.323,14.162 39.323,13.125 46.535,13.125
  region: 40.344,1.709 40.344,3.051 39.379,3.051 39.379,1.709
  region: 40.275,8.652 40.275,9.994 39.377,9.994 39.377,8.652
  region: 38.127,5.944 38.127,3.877 39.202,3.877 39.202,5.944
  region: 36.717,14.162 29.505,14.162 29.505,13.125 36.717,13.125
  region: 30.527,1.709 30.527,3.051 29.562,3.051 29.562,1.709
  region: 30.457,8.652 30.457,9.994 29.56,9.994 29.56,8.652
  region: 28.31,5.944 28.31,3.877 29.385,3.877 29.385,5.944
  region: 26.9,14.162 19.688,14.162 19.688,13.125 26.9,13.125
  region: 20.71,1.709 20.71,3.051 19.745,3.051 19.745,1.709
  region: 20.64,8.652 20.64,9.994 19.743,9.994 19.743,8.652
  region: 18.493,5.944 18.493,3.877 19.568,3.877 19.568,5.944
  region: 17.083,14.162 9.871,14.162 9.871,13.125 17.083,13.125
  region: 10.892,1.709 10.892,3.051 9.927,3.051 9.927,1.709
  region: 10.823,8.652 10.823,9.994 9.926,9.994 9.926,8.652
  region: 8.675,5.944 8.675,3.877 9.75,3.877 9.75,5.944
  region: 7.266,14.162 0.054,14.162 0.054,13.125 7.266,13.125
  region: 1.075,1.709 1.075,3.051 0.11,3.051 0.11,1.709
  region: 1.006,8.652 1.006,9.994 0.108,9.994 0.108,8.652
  region: 49.086,10.583 48.429,11.24 47.813,11.24 47.813,10.941 48.493,10.261 48.493,9.153 49.062,9.153 49.079,9.135
  region: 39.269,10.583 38.611,11.24 37.995,11.24 37.995,10.941 38.676,10.261 38.676,9.153 39.245,9.153 39.262,9.135
  region: 29.452,10.583 28.794,11.24 28.178,11.24 28.178,10.941 28.858,10.261 28.858,9.153 29.427,9.153 29.444,9.135
  region: 19.635,10.583 18.977,11.24 18.361,11.24 18.361,10.941 19.041,10.261 19.041,9.153 19.61,9.153 19.627,9.135
  region: 9.817,10.583 9.16,11.24 8.543,11.24 8.543,10.941 9.224,10.261 9.224,9.153 9.793,9.153 9.81,9.135

## Silkscreen, mask and mechanical layers (free items; w line width, h text height)
Bottom Overlay:
  drawing of 2295 lines, arcs and shapes, not listed
  text "2m" at 9.464,8.996 h2
  text "2m" at 19.282,8.996 h2
  text "2m" at 29.099,8.996 h2
  text "2m" at 38.916,8.996 h2
  text "2m" at 48.733,8.996 h2
  text "Beacon" at 9.464,8.034 h2
  text "Beacon" at 19.282,8.034 h2
  text "Beacon" at 29.099,8.034 h2
  text "Beacon" at 38.916,8.034 h2
  text "Beacon" at 48.733,8.034 h2